# EAGLE board Boost converter (EAGLE 7.2.0)
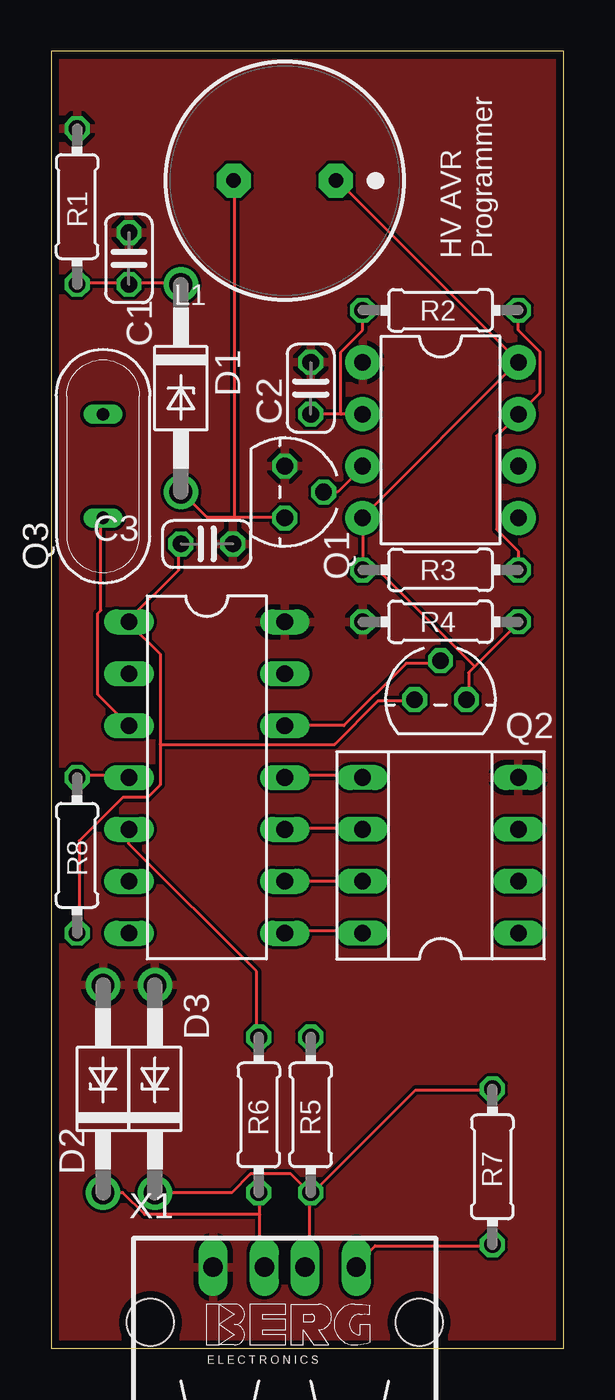
[diagram p0: board, top side]
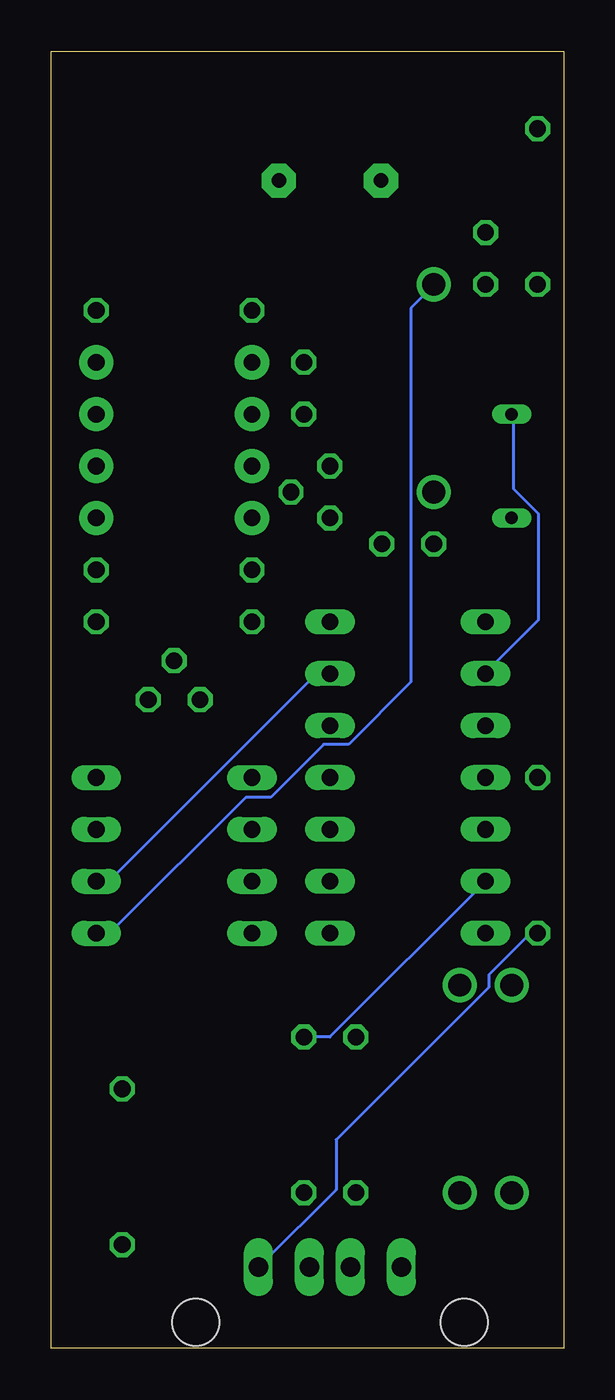
[diagram p1: board, bottom side, seen from below]

Size 25.07 x 63.49 mm. Coordinates in mm from the lower left corner, seen from the top.
Outline: 0,0 25.07,0 25.07,63.49 0,63.49 0,0
Copper layers (1*16): Top 0.0356mm / dielectric 1.5011mm / Bottom 0.0356mm
Design rules "oshparkPCB": minimum track width 6mil, minimum drill 13mil, track to track 6mil, track to pad 6mil, pad to pad 6mil, via to via 6mil, smd to smd 6mil, copper to edge 15mil, drill to drill 6mil, minimum pad ring 7mil, minimum via ring 7mil, stop-mask expansion 3mil, vias tented up to drill 0mil, thermal gap 10mil

## Footprints (pad centres in the part's own frame; a part is rotated, then mirrored left to right if it is on the bottom)
C025-024X044 = drill 0.813 octagon: 1 -1.27,0; 2 1.27,0
DO41Z10 = drill 1.118: A 5.08,0; C -5.08,0
DIL08-ROUND = drill 0.813 pad 1.676: 1 -3.81,-3.81; 2 -1.27,-3.81; 3 1.27,-3.81; 4 3.81,-3.81; 5 3.81,3.81; 6 1.27,3.81; 7 -1.27,3.81; 8 -3.81,3.81
DIL14 = drill 0.813 long: 1 -7.62,-3.81; 2 -5.08,-3.81; 3 -2.54,-3.81; 4 0,-3.81; 5 2.54,-3.81; 6 5.08,-3.81; 7 7.62,-3.81; 8 7.62,3.81; 9 5.08,3.81; 10 2.54,3.81; 11 0,3.81; 12 -2.54,3.81; 13 -5.08,3.81; 14 -7.62,3.81
SOCKET-08 = drill 0.813 long: 1 -3.81,-3.81; 2 -1.27,-3.81; 3 1.27,-3.81; 4 3.81,-3.81; 5 3.81,3.81; 6 1.27,3.81; 7 -1.27,3.81; 8 -3.81,3.81
TSL1112 = drill 0.711 pad 1.676 octagon: 1 -2.5,0; 2 2.5,0
TO-92 = drill 0.813 octagon: 1 -1.27,0; 2 0,1.905; 3 1.27,0
QS = drill 0.61 long: 1 -2.54,0; 2 2.54,0
0204/7 = drill 0.813 octagon: 1 -3.81,0; 2 3.81,0
PN87520 = drill 0.95 long: 1 -3.5,2.71; 2 -1,2.71; 3 1,2.71; 4 3.5,2.71 | hole 2.3: -6.57,0; 6.57,0

## Placement (x,y rotation side)
C1  .1uF  [C025-024X044]  3.81,53.34 90 top
C2  1nF  [C025-024X044]  12.7,46.99 90 top
C3  .1uF  [C025-024X044]  7.62,39.37 0 top
D1  1N4728  [DO41Z10]  6.35,46.99 270 top
D2  1N4728  [DO41Z10]  2.54,12.7 90 top
D3  1N4728  [DO41Z10]  5.08,12.7 90 top
IC1  NE555N  [DIL08-ROUND]  19.05,44.45 270 top
IC2  attiny84  [DIL14]  7.62,27.94 270 top
IC3  attiny85  [SOCKET-08]  19.05,24.13 90 top
L1  TSL1112  [TSL1112]  11.43,57.15 180 top
Q1  2n7000  [TO-92]  11.43,41.91 270 top
Q2  zvp4105  [TO-92]  19.05,31.75 0 top
Q3  [QS]  2.54,43.18 90 top
R1  2.2k  [0204/7]  1.27,55.88 270 top
R2  [0204/7]  19.05,50.8 180 top
R3  [0204/7]  19.05,38.1 180 top
R4  1k  [0204/7]  19.05,35.56 180 top
R5  68  [0204/7]  12.7,11.43 90 top
R6  68  [0204/7]  10.16,11.43 90 top
R7  1.5k  [0204/7]  21.59,8.89 90 top
R8  10k  [0204/7]  1.27,24.13 270 top
X1  [PN87520]  11.43,1.27 0 top

## Library data of the parts
C1-C3 R1-R8 = resistor
D1-D3 = diode
IC1 = adafruit
IC2 IC3 = ic-package
L1 = inductors-tdk
Q1 Q2 = transistor2
Q3 = special
X1 = con-berg; OC_FARNELL: unknown; OC_NEWARK: unknown

## Nets
+5V: IC1.4 IC1.8 L1.1 Q2.3 R3.2 R4.1
GND: C1.2 C2.2 C3.2 D2.A D3.A IC1.1 IC2.14 IC3.4 Q1.1 R1.1 R4.2 X1.1
N$1: IC2.4 R8.1
N$2: D2.C R6.1 X1.2
N$3: D3.C R5.1 R7.2 X1.3
N$4: IC2.6 R5.2
N$5: IC2.5 R6.2
N$6: IC2.8 IC3.8
N$7: IC2.9 IC3.7
N$8: IC2.10 IC3.6
N$9: IC2.11 IC3.5
N$10: IC2.12 Q2.2
N$11: IC2.13 IC3.2
N$12: IC1.7 R2.1 R3.1
N$13: C2.1 IC1.2 R2.2
N$14: IC1.3 Q1.2
N$15: D1.A L1.2 Q1.3
N$16: IC2.3 Q3.1
N$17: IC2.2 Q3.2
V+: C1.1 D1.C IC3.1 R1.2
VCC: C3.1 IC2.1 Q2.1 R7.1 R8.2 X1.4

## Tracks (layer width: path | path; a pad name or v marks a point on that pad's centre or on a via)
+5V
  Top 0.152: 20.73,33.38 22.86,35.51 R4.1 | 20.73,33.38 20.42,33.07 20.42,31.85 Q2.3 | 20.73,33.38 16,38.1 R3.2 IC1.4 15.24,40.69 22.86,48.31 | 22.86,48.31 14.02,57.15 L1.1 | 22.86,48.31 IC1.8
GND
  pour Top: 0,63.5 25.4,63.5 25.4,0 0,0
N$1
  Top 0.152: R8.1 1.37,28.04 3.81,28.04 IC2.4
N$2
  Top 0.152: 10.21,6.55 10.21,4.27 10.36,4.12 X1.2 | 10.21,6.55 10.21,7.62 R6.1 | D2.C 3.5,7.62 4.57,6.55 10.21,6.55
N$3
  Top 0.152: 12.65,7.62 12.65,4.27 12.5,4.12 X1.3 | R7.2 21.49,12.65 17.83,12.65 12.8,7.62 R5.1 12.65,7.62 | D3.C 8.84,7.62 9.75,8.53 11.73,8.53 12.65,7.62
N$4
  Bottom 0.152: R5.2 11.43,15.24 IC2.6
N$5
  Top 0.152: IC2.5 3.81,24.69 10.06,18.44 10.06,15.24 R6.2
N$6
  Top 0.152: IC2.8 11.43,20.42 15.24,20.42 IC3.8
N$7
  Top 0.152: IC3.7 IC2.9
N$8
  Top 0.152: IC2.10 11.43,25.45 15.24,25.45 IC3.6
N$9
  Top 0.152: IC2.11 11.43,28.04 15.24,28.04 IC3.5
N$10
  Top 0.152: IC2.12 14.33,30.48 17.37,33.53 19.05,33.53 Q2.2
N$11
  Bottom 0.152: IC3.2 22.25,22.86 12.19,32.92 11.43,32.92 IC2.13
N$12
  Top 0.152: R3.1 22.86,39.01 21.79,40.08 21.79,44.65 IC1.7 23.93,46.79 23.93,48.77 22.86,49.84 R2.1
N$13
  Top 0.152: IC1.2 14.17,45.72 | 14.17,45.72 C2.1 | R2.2 15.24,49.84 14.17,48.77 14.17,45.72
N$14
  Top 0.152: Q1.2 14.02,41.91 15.24,43.13 IC1.3
N$15
  Top 0.152: 8.99,40.69 7.62,40.69 6.4,41.91 D1.A | 8.99,40.69 11.43,40.69 Q1.3 | 8.99,40.69 8.99,57.15 L1.2
N$16
  Top 0.152: IC2.3 2.29,32 2.29,35.97 2.44,36.12 2.44,40.54 Q3.1
N$17
  Bottom 0.152: Q3.2 2.44,45.72 2.44,42.06 1.22,40.84 1.22,35.66 3.81,33.07 IC2.2
V+
  Top 0.152: 3.81,52.12 1.37,52.12 R1.2 | 3.81,52.12 6.25,52.12 D1.C | 3.81,52.12 C1.1
  Bottom 0.152: IC3.1 22.86,20.42 22.1,20.42 15.54,26.98 14.33,26.98 11.73,29.57 10.52,29.57 7.47,32.61 7.47,50.9 6.4,51.97 D1.C
VCC
  Top 0.152: R7.1 21.49,5.03 15.85,5.03 14.94,4.12 X1.4 | 5.33,29.57 5.33,33.98 3.81,35.51 IC2.1 3.81,35.66 6.25,38.1 6.25,39.32 C3.1 | 5.33,29.57 5.33,27.58 4.72,26.98 3.5,26.98 1.37,24.84 1.37,20.42 R8.2 | 5.33,29.57 13.87,29.57 16,31.7 17.68,31.7 Q2.1
  Bottom 0.152: X1.4 14.78,4.12 11.12,7.77 11.12,10.21 3.66,17.68 3.66,18.29 1.68,20.27 1.37,20.27 R8.2

## Text on the board
tPlace: HV AVR / Programmer